# EAGLE board LAB-ICM100 (EAGLE 6.2)
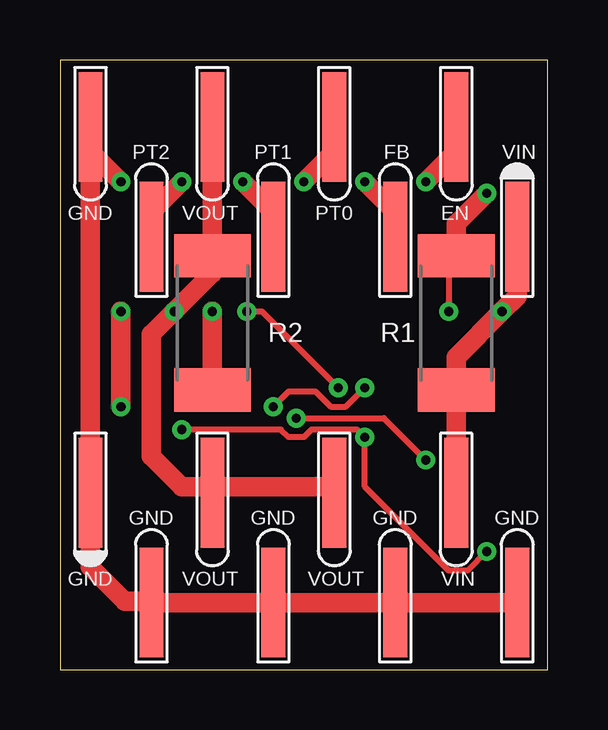
[diagram p0: board, top side]
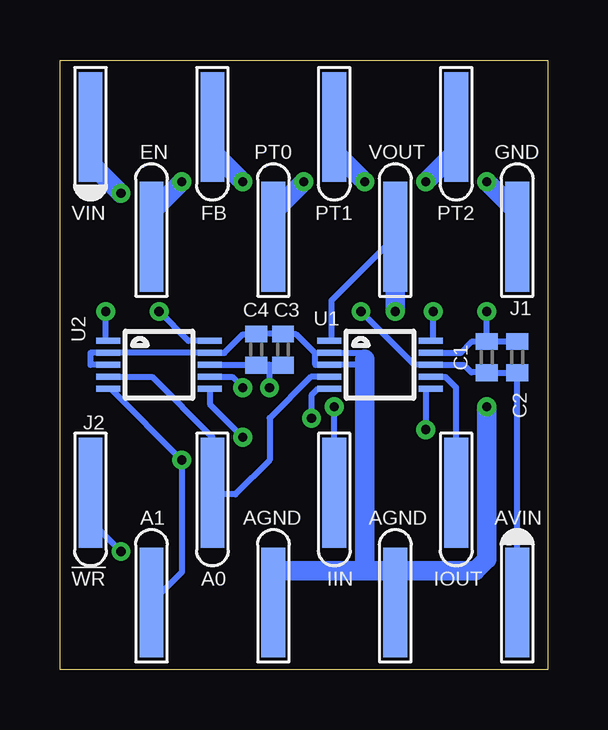
[diagram p1: board, bottom side, seen from below]

Size 20.32 x 25.4 mm. Coordinates in mm from the lower left corner, seen from the top.
Outline: 0,25.4 0,0 20.32,0 20.32,25.4 0,25.4
Copper layers (1*16): Top 0.035mm / dielectric 1.5mm / Bottom 0.035mm
Design rules: minimum track width 6mil, minimum drill 15mil, track to track 8mil, track to pad 8mil, pad to pad 8mil, via to via 8mil, smd to smd 8mil, copper to edge 20mil, drill to drill 8mil, minimum pad ring 10mil, minimum via ring 8mil, stop-mask expansion 4mil, vias tented up to drill 0mil, thermal gap 10mil

## Footprints (pad centres in the part's own frame; a part is rotated, then mirrored left to right if it is on the bottom)
C0402 = smd 0.7 x 0.9: 1 -0.65,0; 2 0.65,0
SMTHEADER-8 = smd 0.991 x 4.572: P$1 -7.62,2.286; P$2 -5.08,-2.286; P$3 -2.54,2.286; P$4 0,-2.286; P$5 2.54,2.286; P$6 5.08,-2.286; P$7 7.62,2.286; P$8 10.16,-2.286
R2512 = smd 1.8 x 3.2: 1 -2.8,0; 2 2.8,0
MSOP10 = smd 0.25 x 1: 1 -1,-2.113; 2 -0.5,-2.113; 3 0,-2.113; 4 0.5,-2.113; 5 1,-2.113; 6 1,2.113; 7 0.5,2.113; 8 0,2.113; 9 -0.5,2.113; 10 -1,2.113

## Placement (x,y rotation side)
C1  .1uF  [C0402]  2.54,13.02 90 bottom
C2  10uF  [C0402]  1.27,13.02 90 bottom
C3  .1uF  [C0402]  11.03,13.34 90 bottom
C4  10uF  [C0402]  12.14,13.34 90 bottom
J1  SULLINSSMTPINHEADER-8  [SMTHEADER-8]  11.43,20.32 0 bottom
J2  SULLINSSMTPINHEADER-8  [SMTHEADER-8]  8.89,5.08 180 bottom
J3  [SMTHEADER-8]  11.43,20.32 180 top
J4  [SMTHEADER-8]  8.89,5.08 0 top
R1  1  [R2512]  16.51,14.45 270 top
R2  1  [R2512]  6.35,14.45 90 top
U1  AD8253  [MSOP10]  6.99,12.7 270 bottom
U2  AD8253  [MSOP10]  16.19,12.7 270 bottom

## Library data of the parts
C1-C4 R1 R2 = rcl
J1-J4 U1 U2 = LAB-PEM300

## Nets
!AN_WR: J2.P$8 U1.6 U2.6
AN_A0: J2.P$6 U1.4 U2.4
AN_A1: J2.P$7 U1.5 U2.5
AN_GND: C1.2 C2.2 C3.2 C4.2 J2.P$3 J2.P$5 U1.2 U1.3 U1.9 U2.2 U2.3 U2.9
AN_IIN: J2.P$4 U2.7
AN_IOUT: J2.P$2 U1.7
AN_VIN: C1.1 C2.1 C3.1 C4.1 J2.P$1 U1.8 U2.8
BRD_VIN: J1.P$1 R1.1 U2.10
BRD_VOUT: J1.P$6 R2.1 U1.1
PSU_EN: J1.P$2 J3.P$2
PSU_FB: J1.P$3 J3.P$3
PSU_GND: J1.P$8 J3.P$8 J4.P$1 J4.P$2 J4.P$4 J4.P$6 J4.P$8
PSU_PT0: J1.P$4 J3.P$4
PSU_PT1: J1.P$5 J3.P$5
PSU_PT2: J1.P$7 J3.P$7
PSU_VIN: J3.P$1 J4.P$7 R1.2 U2.1
PSU_VOUT: J3.P$6 J4.P$3 J4.P$5 R2.2 U1.10

## Tracks (layer width: path | path; a pad name or v marks a point on that pad's centre or on a via)
!AN_WR  (via drill 0.38)
  Top 0.254: v5.08,10 9.21,10 9.53,9.68 10.16,9.68 10.48,10 12.38,10 v12.7,9.68 12.7,7.62 16.19,4.13 16.99,4.13 v17.78,4.92
  Bottom 0.254: U1.6 5.08,11.7 v5.08,10 | U2.6 14.08,11.06 v12.7,9.68 | v17.78,4.92 18.99,6.13 18.99,7.3 J2.P$8
AN_A0
  Bottom 0.254: U1.4 9.87,12.2 11.59,10.48 11.59,8.73 13.02,7.3 13.91,7.3 J2.P$6 13.97,9.68 16.49,12.2 U2.4
AN_A1  (via drill 0.38)
  Top 0.254: v9.84,10.48 13.49,10.48 v15.24,8.73
  Bottom 0.254: 8.89,11.7 U1.5 9.57,11.7 9.84,11.43 v9.84,10.48 | U2.5 18.21,11.7 v15.24,8.73 15.24,4.06 J2.P$7
AN_GND  (via drill 0.38)
  Top 0.813: v2.54,10.95 v2.54,14.92
  Bottom 0.254: 2.56,13.65 C1.2 C2.2 | U2.3 19.05,12.7 19.05,13.2 U2.2 U2.9 13.47,13.2 12.7,13.97 12.16,13.97 C4.2 C3.2 11.02,13.97 10.48,13.97 9.71,13.2 9.68,13.2 9.68,12.7 U1.3 7.62,12.7 | 2.56,13.65 3.17,13.65 3.63,13.2 U1.9 | 2.56,13.65 2.54,13.65 v2.54,14.92 | 11.43,4.13 11.43,3.81 J2.P$5 | U1.2 7.62,13.2 7.62,12.94 | 6.35,4.13 6.35,3.81 J2.P$3
  Bottom 0.813: 11.43,3.81 11.11,4.13 7.62,4.13 | 7.62,4.13 6.35,4.13 6.03,4.13 | 6.03,4.13 6.35,3.81 | 7.62,4.13 7.62,12.7 7.62,12.94 | 6.03,4.13 3.02,4.13 2.54,4.6 v2.54,10.95
AN_IIN  (via drill 0.38)
  Top 0.254: v8.89,10.95 9.53,11.59 10.64,11.59 11.27,10.95 11.91,10.95 v12.7,11.75
  Bottom 0.254: U2.7 13.15,12.2 v12.7,11.75 | J2.P$4 v8.89,10.95
AN_IOUT
  Bottom 0.254: U1.7 4.26,12.2 3.97,11.91 3.81,11.75 J2.P$2
AN_VIN  (via drill 0.38)
  Top 0.254: v7.78,14.92 8.41,14.92 v11.59,11.75
  Bottom 0.254: 1.6,12.37 1.59,12.38 1.57,12.37 C2.1 | v7.78,14.92 5.56,12.7 U1.8 3.49,12.7 3.17,12.38 2.56,12.38 C1.1 C2.1 | U2.8 12.38,12.7 12.37,12.69 C4.1 12.13,12.7 11.59,12.7 | 11.59,12.7 11.02,12.7 | v11.59,11.75 11.59,12.7 | 10.79,12.7 11.02,12.7 | 11.02,12.7 C3.1 | J2.P$1 C2.1
BRD_VIN  (via drill 0.38)
  Top 0.254: R1.1 arc90 16.19,16.93 v16.19,14.92
  Top 0.813: R1.1 16.51,18.57 v17.78,19.84
  Bottom 0.254: U2.10 14.97,13.7 v16.19,14.92
  Bottom 0.813: v17.78,19.84 19.05,21.11 J1.P$1
BRD_VOUT  (via drill 0.38)
  Top 0.813: R2.1 v6.35,14.92
  Bottom 0.254: 6.13,18.63 6.35,18.41 J1.P$6 9,15.38 9,13.7 U1.1
  Bottom 0.813: v6.35,14.92 J1.P$6
PSU_EN  (via drill 0.38)
  Top 0.813: J3.P$2 16.51,21.59 v15.24,20.32
  Bottom 0.813: v15.24,20.32 16.51,19.05 J1.P$2
PSU_FB  (via drill 0.38)
  Top 0.813: v12.7,20.32 13.97,19.05 J3.P$3
  Bottom 0.813: J1.P$3 13.97,21.59 v12.7,20.32
PSU_GND  (via drill 0.38)
  Top 0.254: J4.P$2 3.81,2.86
  Top 0.813: J4.P$8 J4.P$6 J4.P$4 J4.P$2 | 3.81,2.86 2.7,2.86 1.27,4.29 J4.P$1 1.27,21.59 | J3.P$8 1.27,21.59 | 1.27,21.59 v2.54,20.32
  Bottom 0.813: v2.54,20.32 1.27,19.05 J1.P$8
PSU_PT0  (via drill 0.38)
  Top 0.813: J3.P$4 11.43,21.59 v10.16,20.32
  Bottom 0.813: v10.16,20.32 11.43,19.05 J1.P$4
PSU_PT1  (via drill 0.38)
  Top 0.813: v7.62,20.32 8.89,19.05 J3.P$5
  Bottom 0.813: J1.P$5 8.89,21.59 v7.62,20.32
PSU_PT2  (via drill 0.38)
  Top 0.813: J3.P$7 3.81,19.05 v5.08,20.32
  Bottom 0.813: v5.08,20.32 3.81,21.59 J1.P$7
PSU_VIN  (via drill 0.38)
  Top 0.813: J4.P$7 R1.2 16.51,13.02 v18.41,14.92 19.05,15.56 J3.P$1
  Bottom 0.254: v18.41,14.92 18.41,13.7 U2.1
PSU_VOUT  (via drill 0.38)
  Top 0.813: J3.P$6 R2.2 6.35,16.51 v4.76,14.92 3.81,13.97 3.81,8.89 5.08,7.62 6.35,7.62 J4.P$3 6.6,7.62 11.43,7.62 J4.P$5
  Bottom 0.254: U1.10 4.76,13.7 v4.76,14.92

## Text on the board
tNames: PT2 | PT1 | FB | VIN | GND | VOUT | PT0 | EN | GND | GND | GND | GND | GND | VOUT | VOUT | VIN
bNames: GND | VOUT | PT0 | EN | PT2 | PT1 | FB | VIN | J1 | J2 | AVIN | AGND | AGND | A1 | IOUT | IIN | A0 | !WR